# Altium PCB RemotePCB.PcbDoc
Units mm, origin at the board's own origin, x right, y up, seen from the top; angles counter-clockwise.
Board outline 43.74 x 45.87 mm, 2 copper layers (Top Layer, Bottom Layer); 13 components, 10 nets, 33 pads, 0 vias.
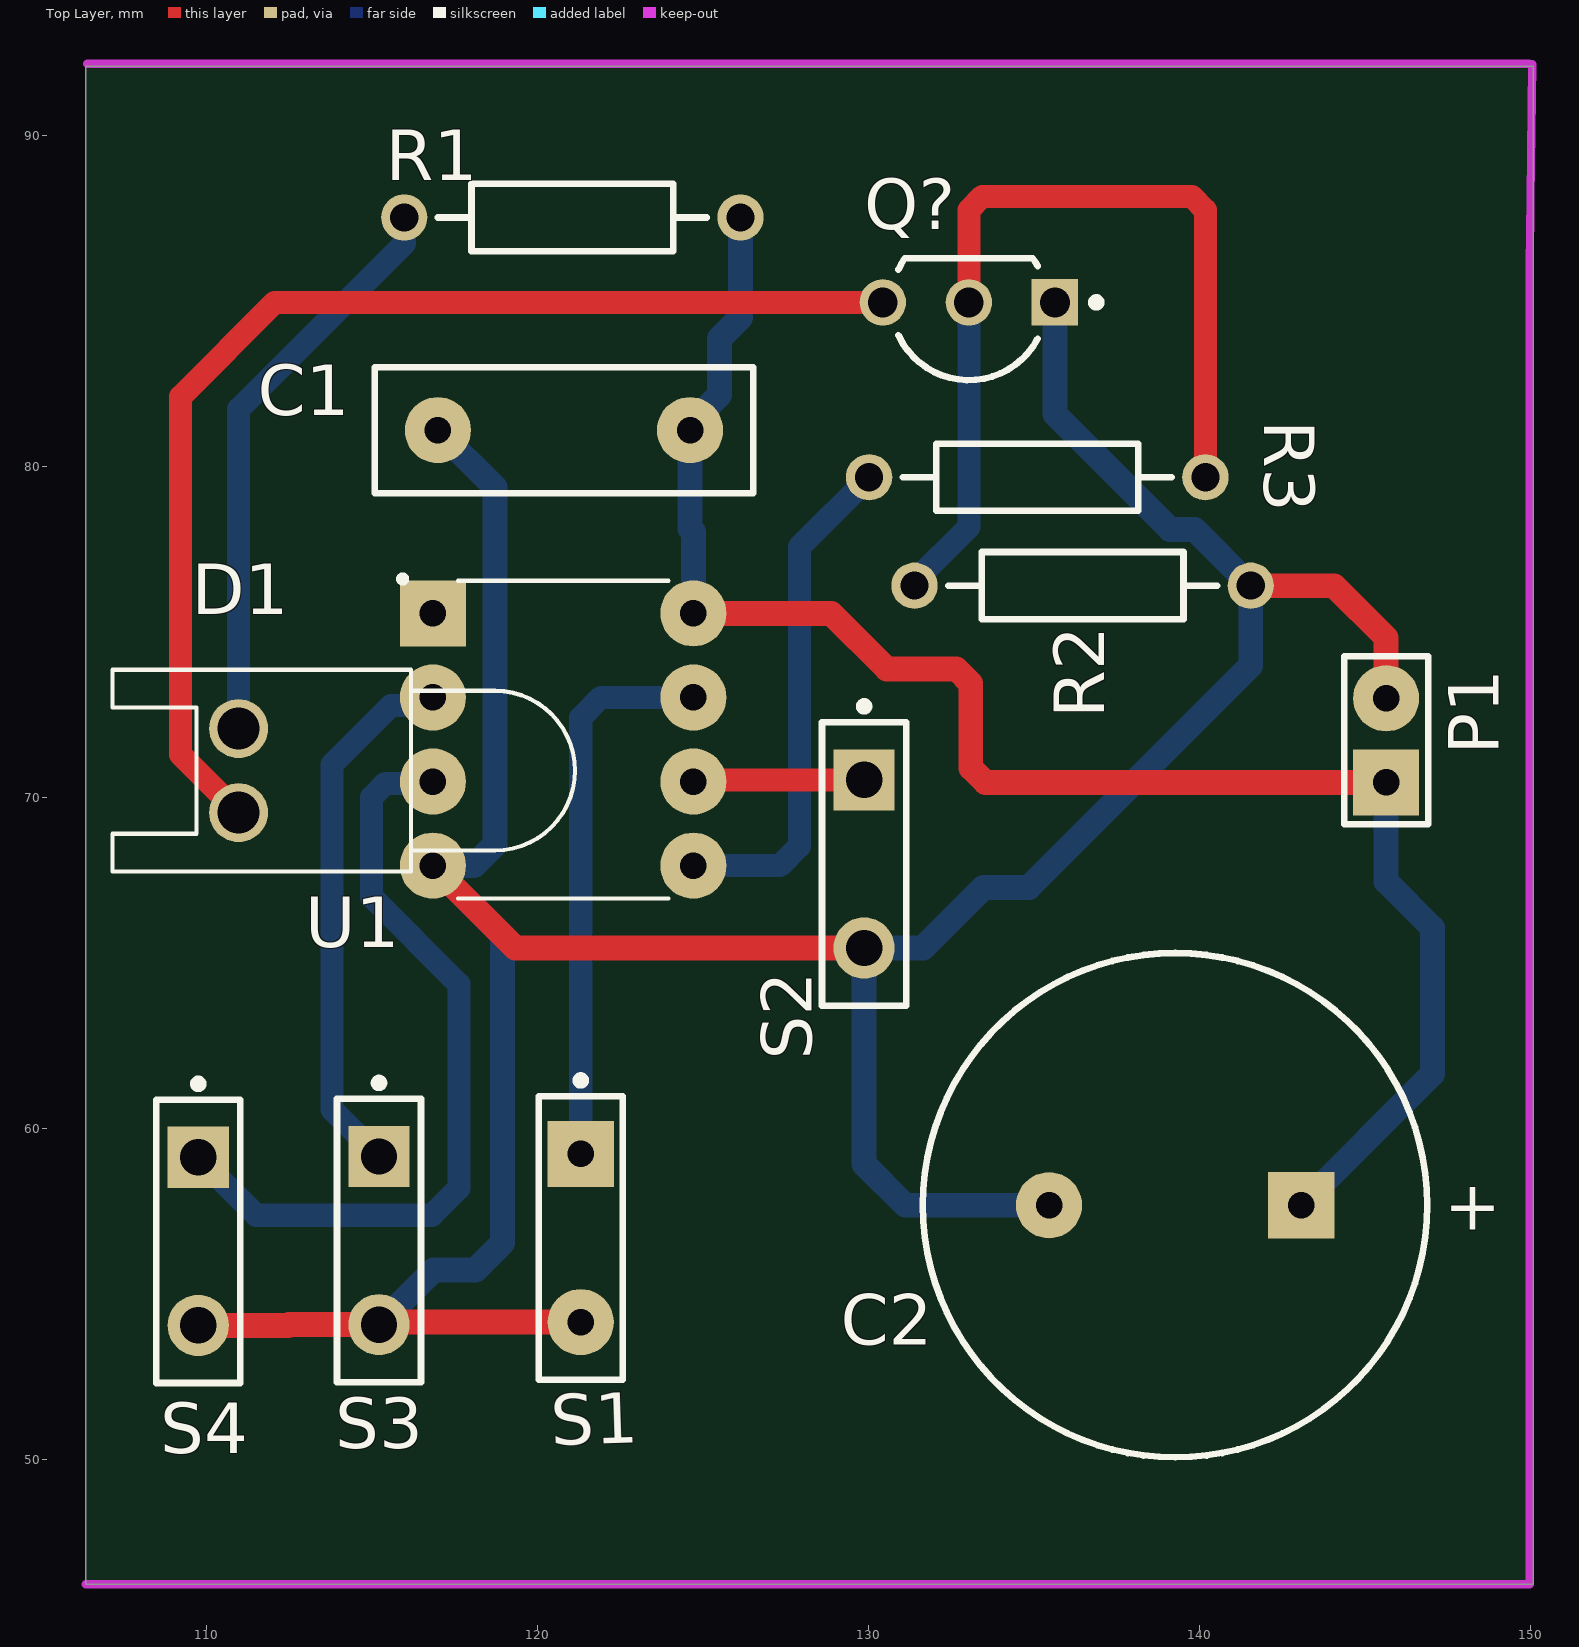
[diagram p0: Top Layer view]
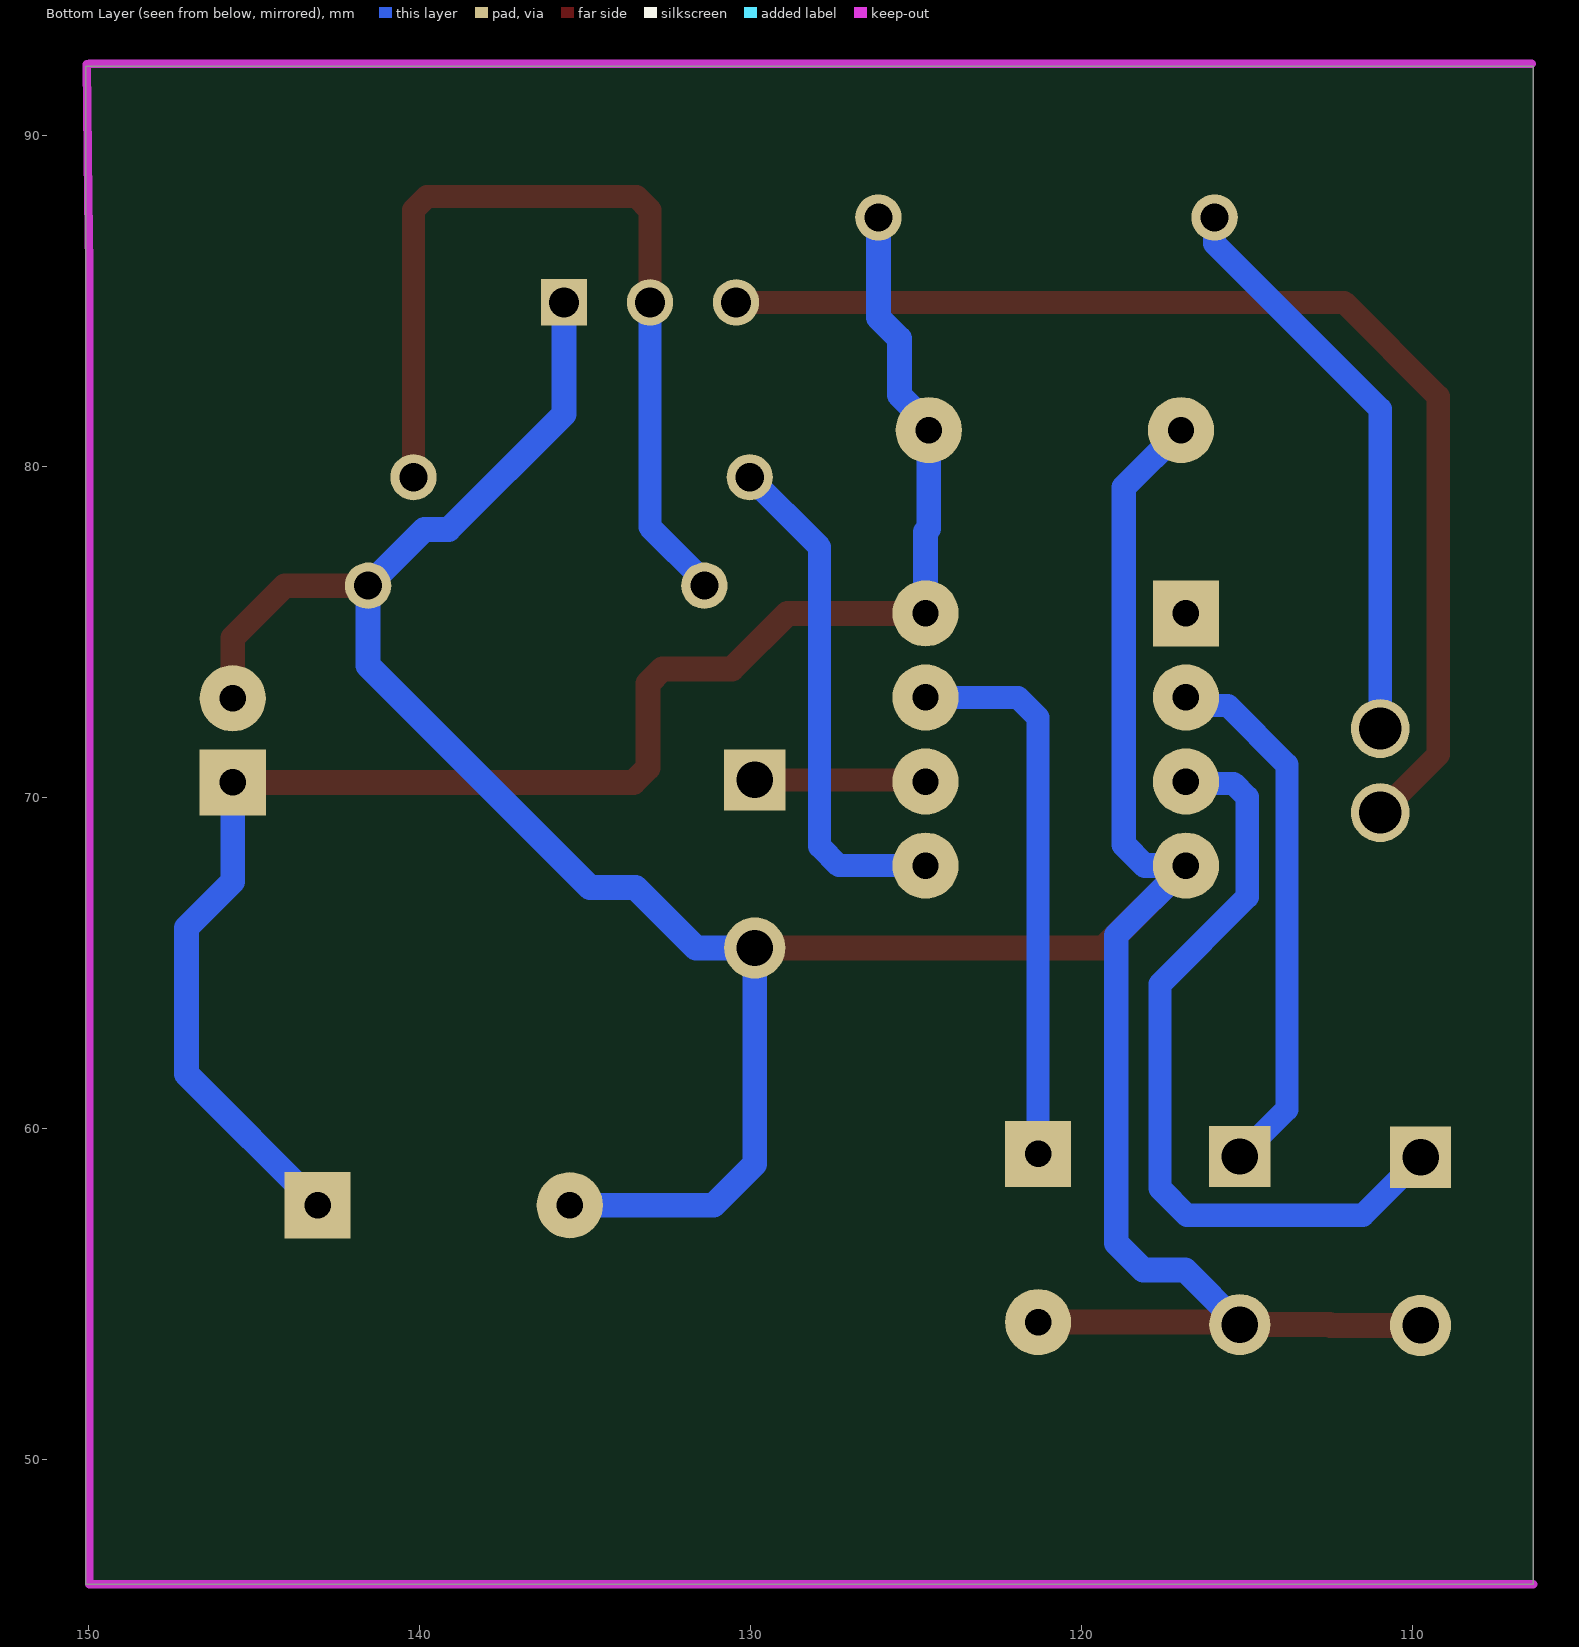
[diagram p1: Bottom Layer view, seen from below]

## Layer stack, top to bottom
Top Solder: solder mask 0.0102, Solder Resist, Dk 3.5
Top Layer: signal copper 0.0356
Dielectric 1: dielectric 0.32, FR-4, Dk 4.8
Bottom Layer: signal copper 0.0356
Bottom Solder: solder mask 0.0102, Solder Resist, Dk 3.5

## Board outline
106.35,46.228 106.35,92.1 150.089,92.1 150.089,46.228

## Design rules (kind name [scope] priority, off if disabled: settings)
Clearance [All] p1: gap=0.5 ignorepadtopadclearanceinfootprint=FALSE
PolygonConnect [All] p1: connectstyle=Relief reliefconductorwidth=0.254 reliefentries=4 polygonreliefangle="90 Angle" airgapwidth=0.254
RoutingVias [All] p1: holewidth=1 width=2.2 viastyle="Through Hole" minholewidth=1 minwidth=2.2 maxholewidth=1 maxwidth=2.2
SilkToSolderMaskClearance [IsPad] p1: minsilkscreentomaskgap=0.05 clearancetoexposedcopper=TRUE
SolderMaskExpansion [All] p1: expansion=0.102 istentingtop=FALSE
SupplyNets "Schematic Supply Nets_1" [InNet('VCC')] p1: voltage=0.000
SupplyNets "Schematic Supply Nets" [InNet('GND')] p2: voltage=0.000
Width Power_Width [InNet('GND') or InNet('VCC') or InNet('NetD1_2')] p1: maxlimit=0.75 minlimit=0.75 preferedwidth=0.75 minimp=50.000000 maximp=50.000000 favimp=50.000000
Width [All] p2: maxlimit=1.5 minlimit=0.5 preferedwidth=0.7
29 further rules are at their usual default settings.

## Components (designator, comment, footprint, x,y, rotation, side; value= is the part's Value field where it differs from the comment)
C1 "C_BYPASS" RAD-0.3 120.802,81.102 r180 top value=100nF
C2 "C_BULK" RB7.6-15 139.268,57.683 r0 top value=10µF
D1 "LED0" LED-0 110.973,70.815 r90 top
P1 "Header 2" HDR1X2 145.644,70.46 r90 top
Q? "2N2222" ONSC-TO-92-3-29-11_AM_BL 133.036,84.963 r180 top
R1 "R_LED" AXIAL-0.4 121.056,87.528 r180 top value=33
R2 "R_GATE_PULLDOWN" AXIAL-0.4 136.474,76.403 r0 top value=10K
R3 "R_GATE_SERIES" AXIAL-0.4 135.103,79.68 r0 top value=220
S1 "SW-SPST" SPST-2#1 121.31,56.693 r270 top
S2 "SW-SPST" SPST-2#2 129.87,67.996 r270 top
S3 "SW-SPST" SPST-2#2 115.214,56.617 r270 top
S4 "SW-SPST" SPST-2#2 109.753,56.591 r270 top
U1 "ATTINY45-20PU" DIP787W46P254L927H533Q8 120.777,71.755 r0 top

## Footprints (in the part's own frame and the unit in brackets; to place one, negate y for a bottom-side part, rotate by r counter-clockwise, add the part's x,y. Pads: shape width x height; smd on the part's side, far side on the other; paste and mask are expansions set on the pad)
AXIAL-0.4 [mm] "Axial Device, Thru-Hole; 2 Leads; 0.4 in Pin Spacing"
  round 1.4 hole 0.85: 1(-5.08,0) 2(5.08,0)
  silkscreen extent -4.06,-1.02 4.06,1.02
DIP787W46P254L927H533Q8 [mm]
  rect 2x2 hole 0.8: 1(-3.935,3.81)
  round 2 hole 0.8: 2(-3.935,1.27) 3(-3.935,-1.27) 4(-3.935,-3.81) 5(3.935,-3.81) 6(3.935,-1.27) 7(3.935,1.27) 8(3.935,3.81)
  silkscreen extent -4.95,-4.8 3.18,4.95
HDR1X2 [mm] "Connector; Header; 2 Position"
  rect 2x2 hole 0.8: 1(0,0)
  round 2 hole 0.8: 2(2.54,0)
  silkscreen extent -1.27,-1.27 3.81,1.27
LED-0 [mil] "LED; 2 Leads"
  round 70 hole 50: 1(50,0) 2(-50,0)
  silkscreen extent -120,-400 120,150
ONSC-TO-92-3-29-11_AM_BL [mm] "TO, 3-Leads, Body Dia 4.7mm, Pitch 2.6mm"
  rect 1.4x1.4 hole 0.9: 1(-2.6,0)
  round 1.4 hole 0.9: 2(0,0) 3(2.6,0)
  silkscreen extent -3.98,-1.34 2.13,2.35, body extent -2.84,-1.34 2.84,2.35, height 5.33
RAD-0.3 [mm] "Radial Cap, Thru-Hole; 2 Leads; 0.3 in Pin Spacing"
  round 2 hole 0.8: 1(-3.81,0) 2(3.81,0)
  silkscreen extent -5.71,-1.91 5.71,1.91
RB7.6-15 [mm] "Polarized Capacitor (Radial); 2 Leads"
  rect 2x2 hole 0.8: 1(3.81,0)
  round 2 hole 0.8: 2(-3.81,0)
  silkscreen extent -7.62,-7.62 7.62,7.62
SPST-2#1 [mm] "Switch; 2 Leads"
  rect 2x2 hole 0.8: 1(-2.54,0)
  round 2 hole 0.8: 2(2.54,0)
  silkscreen extent -4.89,-1.27 4.28,1.27
SPST-2#2 [mm] "Switch; 2 Leads"
  rect 1.85x1.85 hole 1.1: 1(-2.54,0)
  round 1.85 hole 1.1: 2(2.54,0)
  silkscreen extent -4.89,-1.27 4.28,1.27

## Part data
C1: library part Cap, "Capacitor", LatestRevisionDate=17-Jul-2002, LatestRevisionNote="Re-released for DXP Platform.", PackageDescription="Radial Cap, Thru-Hole; 2 Leads; 0.3 in Pin Spacing", PackageReference=RAD-0.3, Published=8-Jun-2000, Publisher="Altium Limited"
C2: library part "Cap Pol1", "Polarized Capacitor (Radial)", LatestRevisionDate=17-Jul-2002, LatestRevisionNote="Re-released for DXP Platform.", PackageDescription="Polarized Capacitor (Radial); 2 Leads", PackageReference=RB7.6-15, Published=8-Jun-2000, Publisher="Altium Limited"
D1: "Typical INFRARED GaAs LED", LatestRevisionDate=08-Jul-2005, LatestRevisionNote="Mech Layer 1 removed.", PackageDescription="LED; 2 Leads", PackageReference=LED-0, Published=8-Jun-2000, Publisher="Altium Limited"
P1: "Header, 2-Pin", LatestRevisionDate=17-Jul-2002, LatestRevisionNote="Re-released for DXP Platform.", Publisher="Altium Limited"
Q?: library part CMP-1048-01601-1, "Amplifier Transistor, NPN Silicon, 3-Pin TO-92, Pb-Free, Ammo Box", Manufacturer="On Semiconductor", PartNumber=BC548BZL1G, ComponentLink1Description="Manufacturer URL", ComponentLink1URL=http://www.onsemi.com/, ComponentLink2Description=Datasheet, ComponentLink2URL=http://www.onsemi.com/pub_link/Collateral/BC546-D.PDF, ComponentLink3Description="Package Specification", ComponentLink3URL=http://www.onsemi.com/pub_link/Collateral/MAC97-D.PDF, DatasheetVersion="Rev. 7", fT Min (MHz)=150, Mounting Technology="Through Hole", PackageDescription="3-Pin Transistor Outline, Body 4.825 x 3.685 mm, Pitch 1.27 mm", PackageReference=TO-92-3-29-11_AM_BL, PackageVersion="Rev. AM", Packing="Ammo Box", Polarity=NPN, RoHS=TRUE, IC Continuous (A)=0.1
R1 R2 R3: library part Res1, "Resistor", LatestRevisionDate=17-Jul-2002, LatestRevisionNote="Re-released for DXP Platform.", PackageDescription="Axial Device, Thru-Hole; 2 Leads; 0.3 in Pin Spacing", PackageReference=AXIAL-0.3, Published=8-Jun-2000, Publisher="Altium Limited"
S1 S2 S3 S4: "Single-Pole, Single-Throw Switch", LatestRevisionDate=17-Jul-2002, LatestRevisionNote="Re-released for DXP Platform.", PackageDescription="Switch; 2 Leads", PackageReference=SPST-2, Published=24-Mar-1999, Publisher="Altium Limited"
U1: Package=None, Availability=Unavailable, MP=ATTINY45-20PU, Price=None

## Nets (pads, with @x,y where several pads share a name; then routed paths per layer and width w, separated by ;. In a path a pad name is that pad's centre, name@x,y a point inside that pad or via, vN(x,y) a via of type N, cw(c..) or ccw(c..) an arc to the next point about the centre after c; other vN are vias at no path point)
BUTTON_IN: S1.1 U1.7 | length 16.8
  Bottom Layer w0.7: S1.1 121.31,72.415 121.92,73.025 U1.7
BUTTON_IN_1: S2.1 U1.6 | length 5.2
  Top Layer w0.7: U1.6 124.763,70.536 S2.1
BUTTON_IN_2: S3.1 U1.2 | length 16.3
  Bottom Layer w0.7: S3.1 113.792,60.579 113.792,70.995 115.582,72.785 116.602,72.785 U1.2
BUTTON_IN_3: S4.1 U1.3 | length 23.9
  Bottom Layer w0.7: S4.1 111.503,57.382 116.814,57.382 117.627,58.195 117.627,64.365 114.992,67 114.992,70.016 115.402,70.426 116.783,70.426 U1.3
GATE_DRIVE: Q?.2 R2.1 R3.2 | length 27.6
  Top Layer w0.7: Q?.2 133.036,87.753 133.446,88.163 139.773,88.163 140.183,87.753 R3.2
  Bottom Layer w0.7: R2.1 131.394,76.53 133.036,78.172 Q?.2
GND: C1.2 C2.2 P1.2 Q?.1 R2.2 S1.2 S2.2 S3.2 S4.2 U1.4 | length 106.3
  Top Layer w0.75: S4.2 112.471,54.051 112.497,54.077 S3.2 115.291,54.153 S1.2 ; U1.4 119.331,65.456 S2.2 ; R2.2 144.069,76.403 145.644,74.828 P1.2
  Bottom Layer w0.75: S3.2 116.865,55.728 118.131,55.728 118.948,56.545 118.948,65.839 U1.4 118.085,67.945 118.72,68.58 118.72,79.375 C1.2 ; C2.2 131.115,57.683 129.87,58.928 S2.2 131.648,65.456 133.477,67.285 134.849,67.285 141.554,73.99 R2.2 139.853,78.105 139.116,78.105 135.636,81.585 Q?.1
LED_DRIVE: D1.1 R1.2 | length 17.5
  Bottom Layer w0.7: D1.1 110.973,81.737 115.976,86.741 R1.2
LED_OUT: D1.2 Q?.3 | length 35.7
  Top Layer w0.7: D1.2 109.22,71.298 109.22,82.118 112.065,84.963 Q?.3
MCU_OUT: R3.1 U1.5 | length 15.5
  Bottom Layer w0.7: U1.5 127.33,67.945 127.914,68.529 127.914,77.572 R3.1
VCC: C1.1 C2.1 P1.1 R1.1 U1.8 | length 52
  Top Layer w0.75: U1.8 128.88,75.565 130.556,73.889 132.657,73.889 133.096,73.449 133.096,70.899 133.535,70.46 P1.1
  Bottom Layer w0.75: C1.1 124.612,78.132 124.712,78.033 U1.8 ; C1.1@124.612,81.278 125.501,82.167 125.501,83.871 126.136,84.506 R1.1 ; C2.1 147.041,61.646 147.041,66.065 145.644,67.462 P1.1
pads on no net: U1.1

## Keep-outs
Keep-Out Layer:
  lines w0.254: 106.35,46.228 149.978,46.228 149.978,86.056 150.006,88.117 150.06,92.152 149.973,92.177 106.401,92.177

## Text inside footprints (layer, text, board x,y; h text height)
C2: Top Overlay "+" at 147.4,56.947 h1.5